# Altium PCB ISL62368v1.PcbDoc
Units mm, origin at the board's own origin, x right, y up, seen from the top; angles counter-clockwise.
Board outline 50 x 50 mm, 6 copper layers (L1, L2, L3, L4, L5, L6), stack 0.816 mm thick; 41 components, 27 nets, 119 pads, 43 vias.
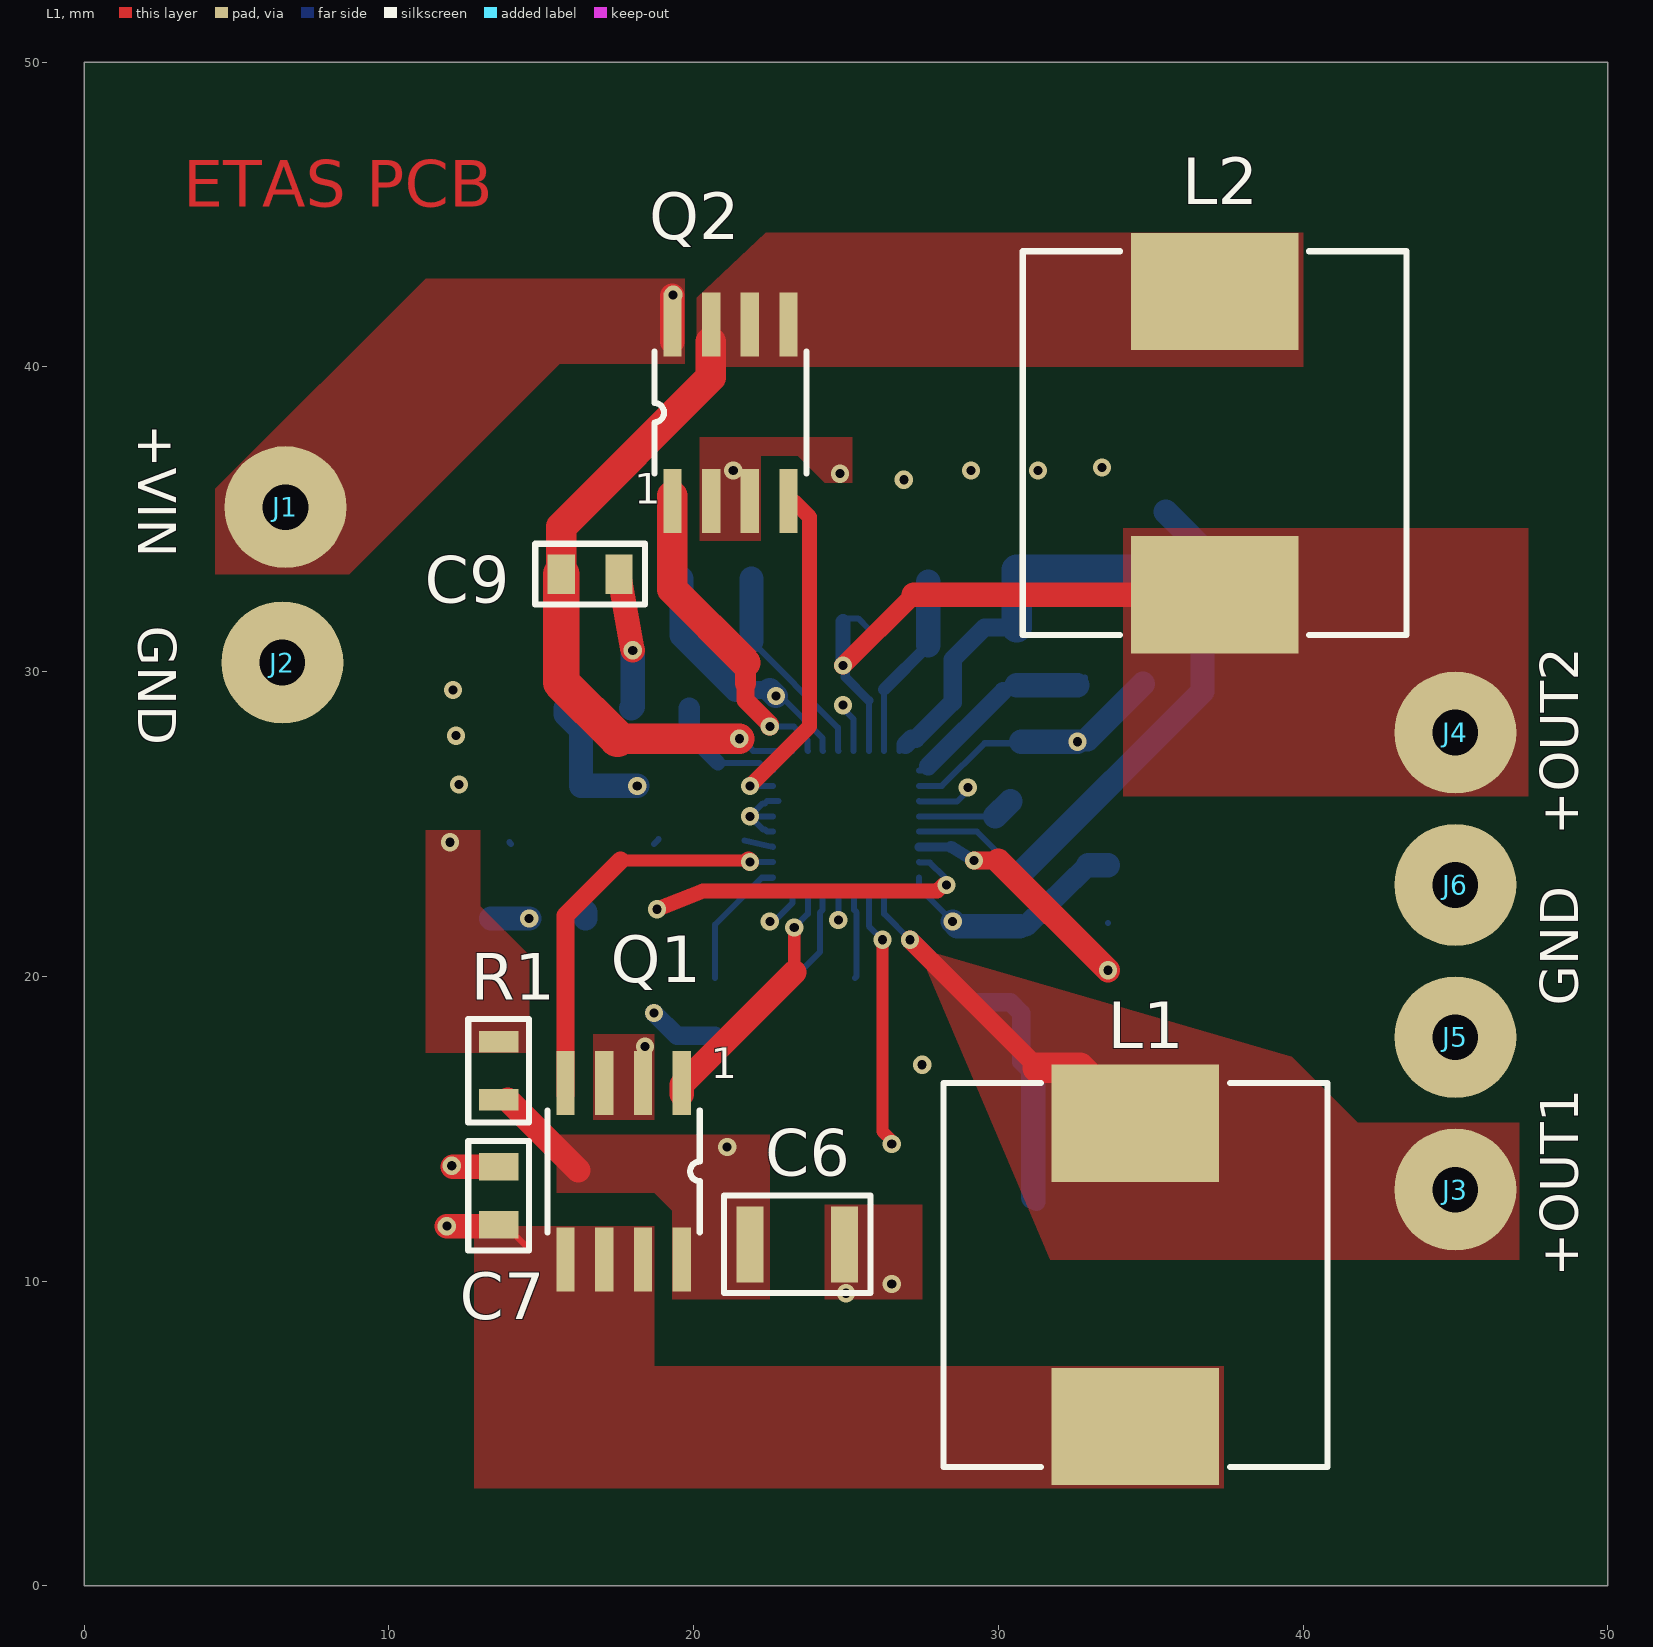
[diagram p0: L1 view]
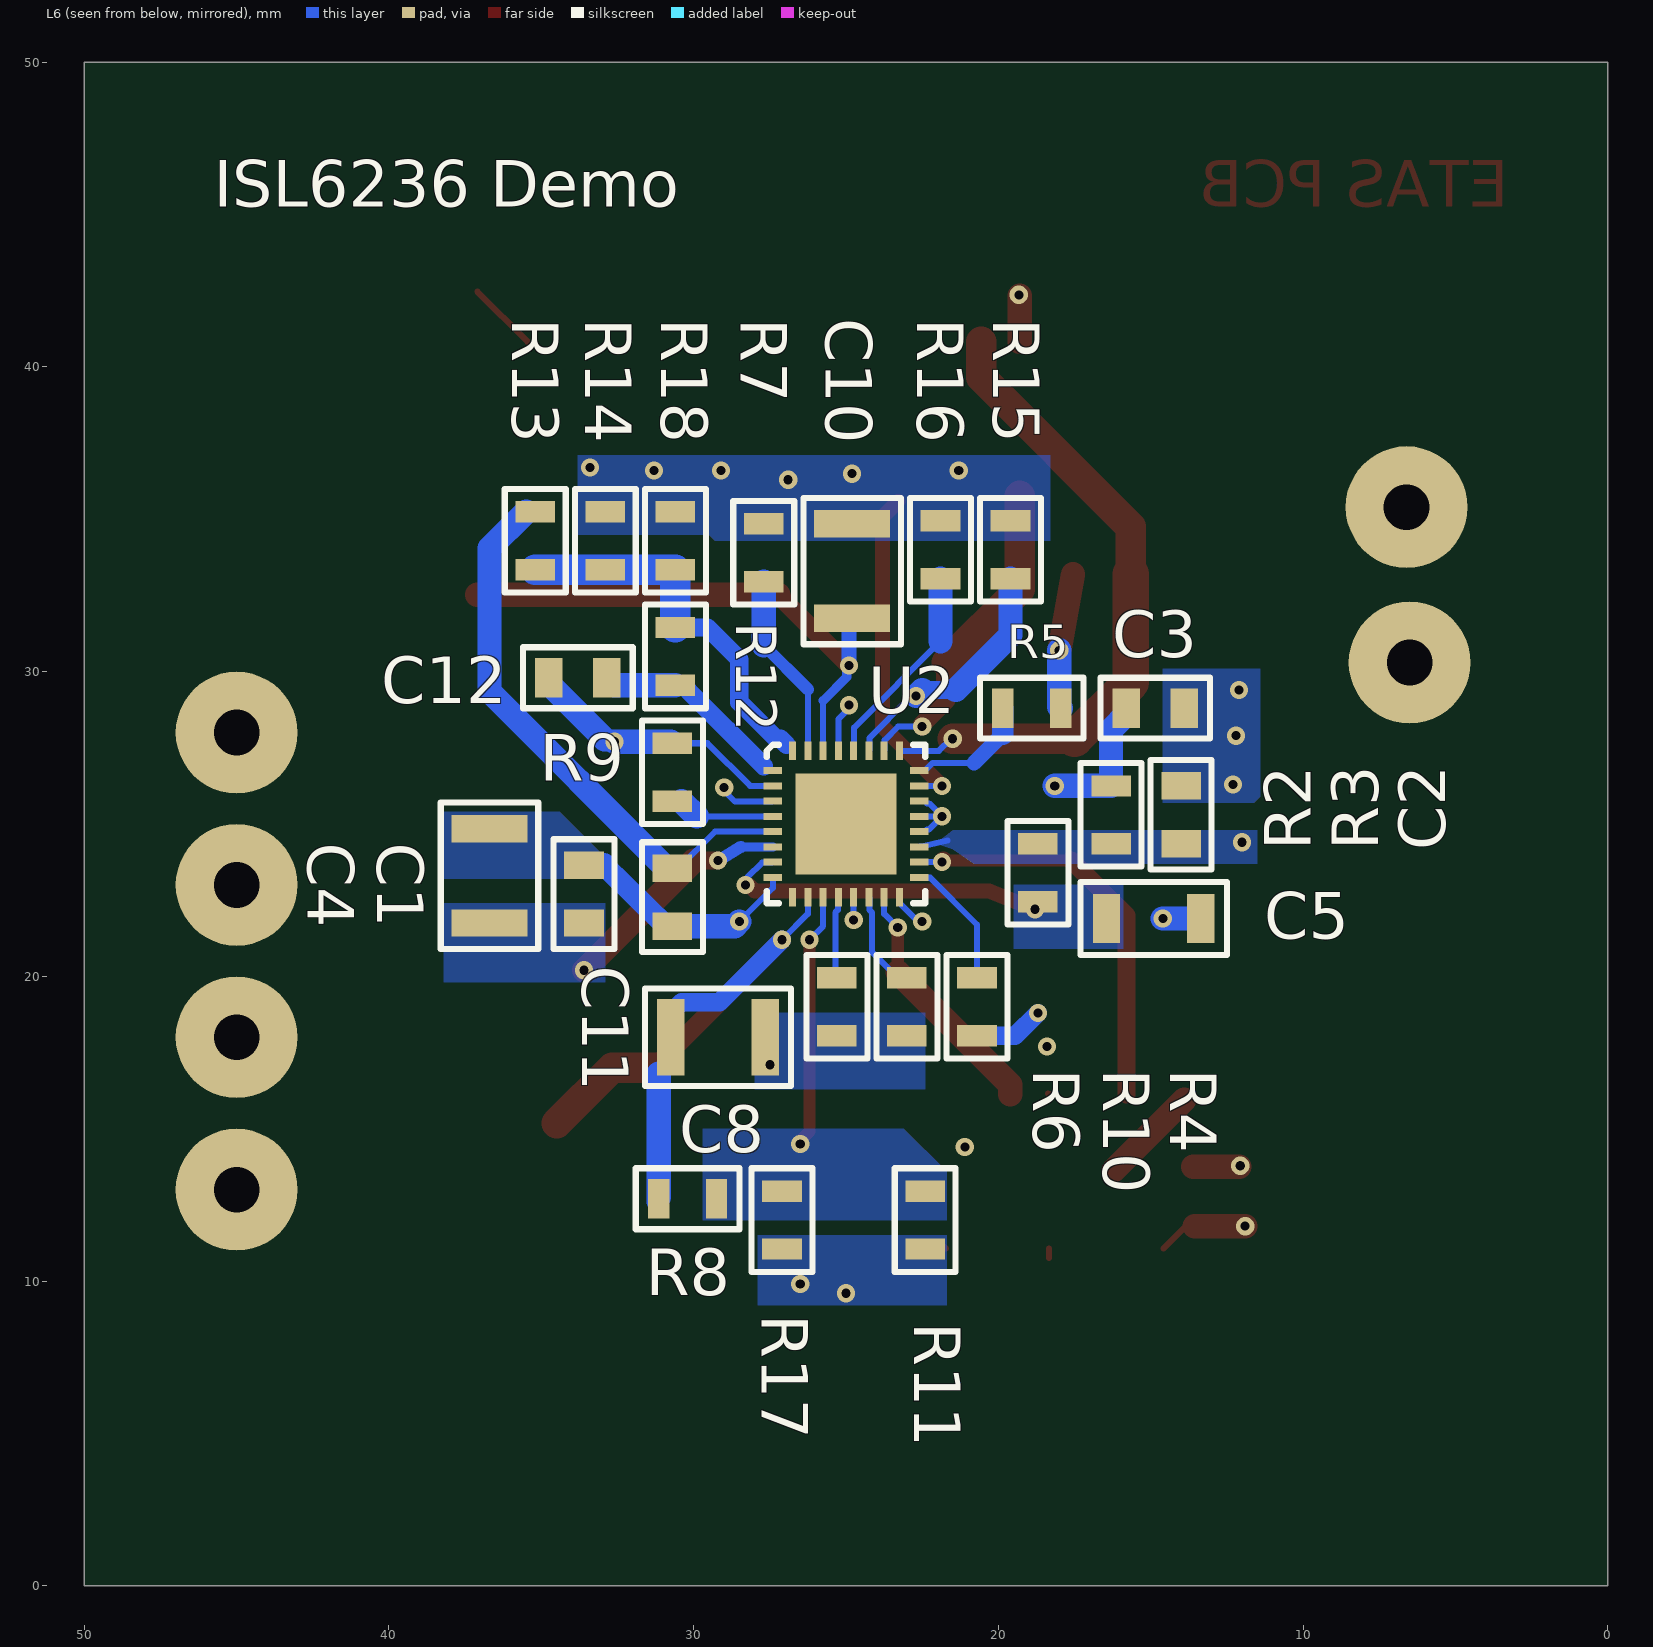
[diagram p1: L6 view, seen from below]
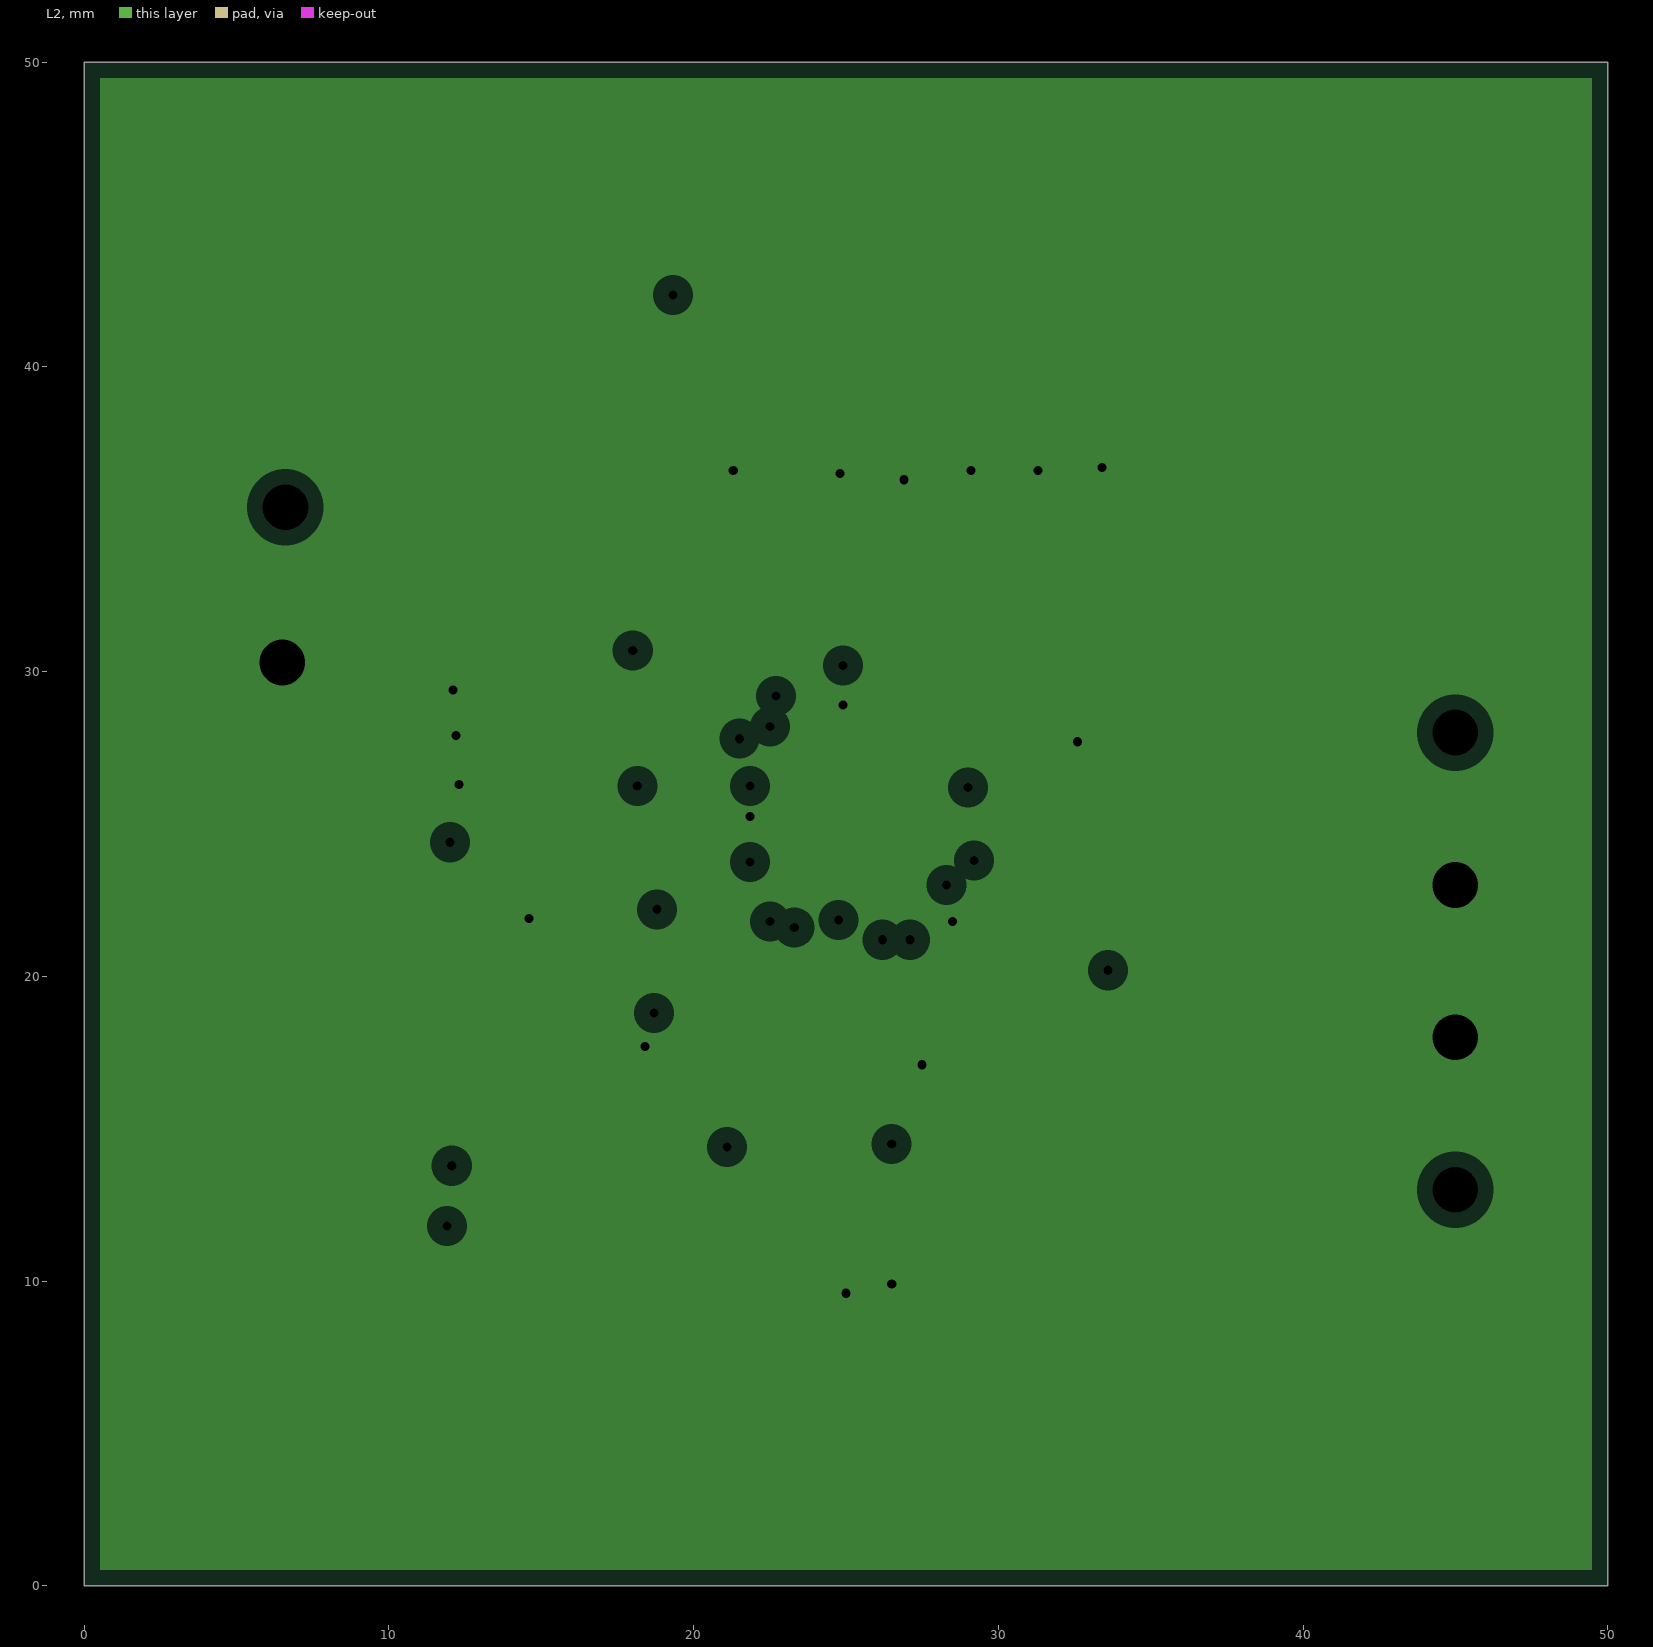
[diagram p2: L2, clearances drawn from the general rule]
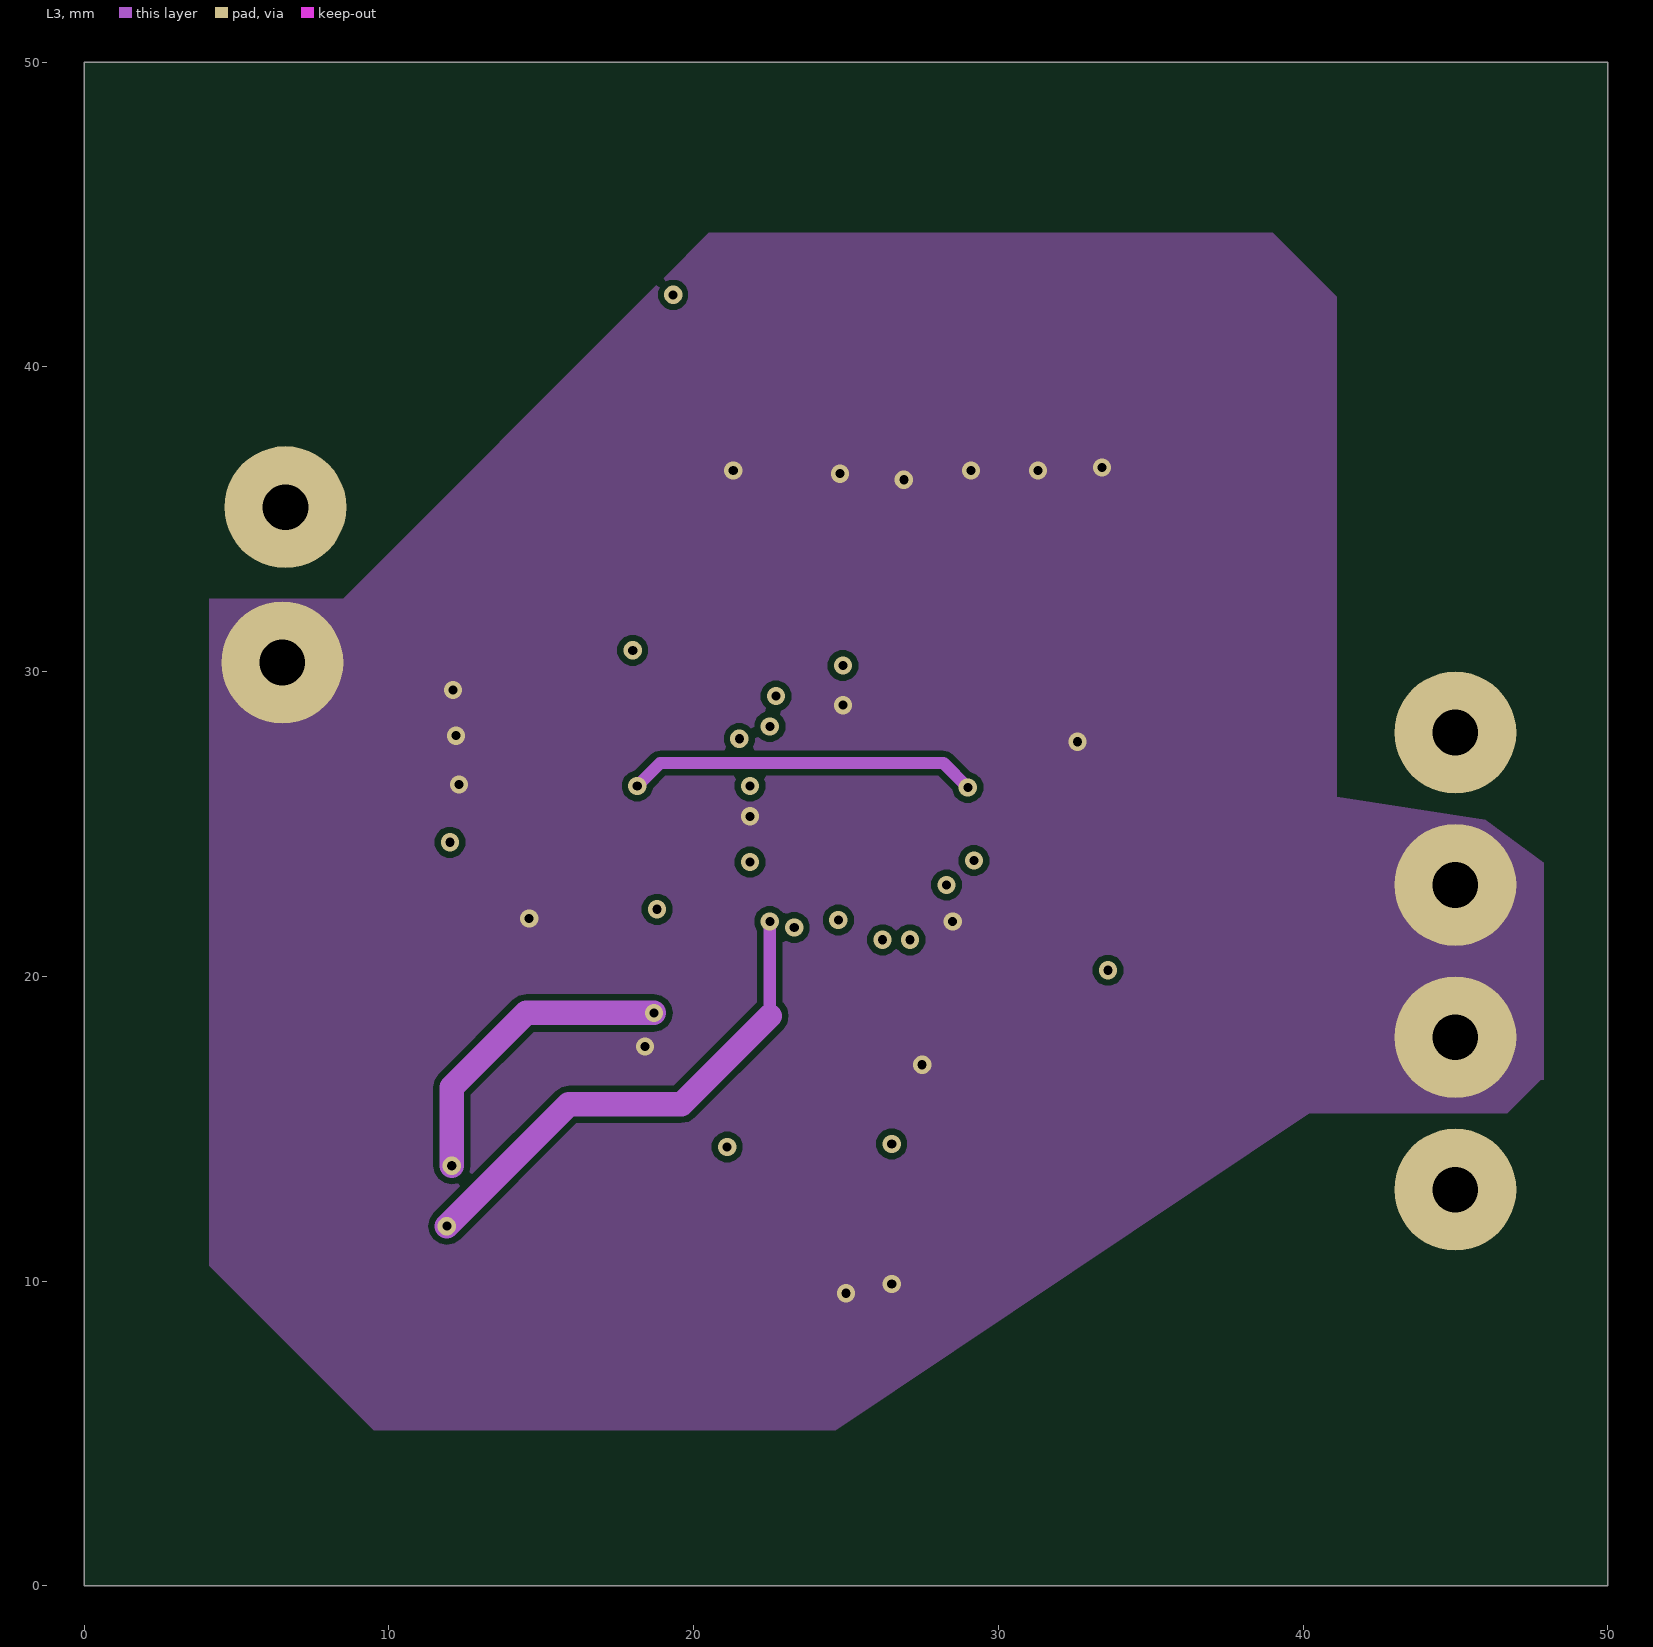
[diagram p3: L3]
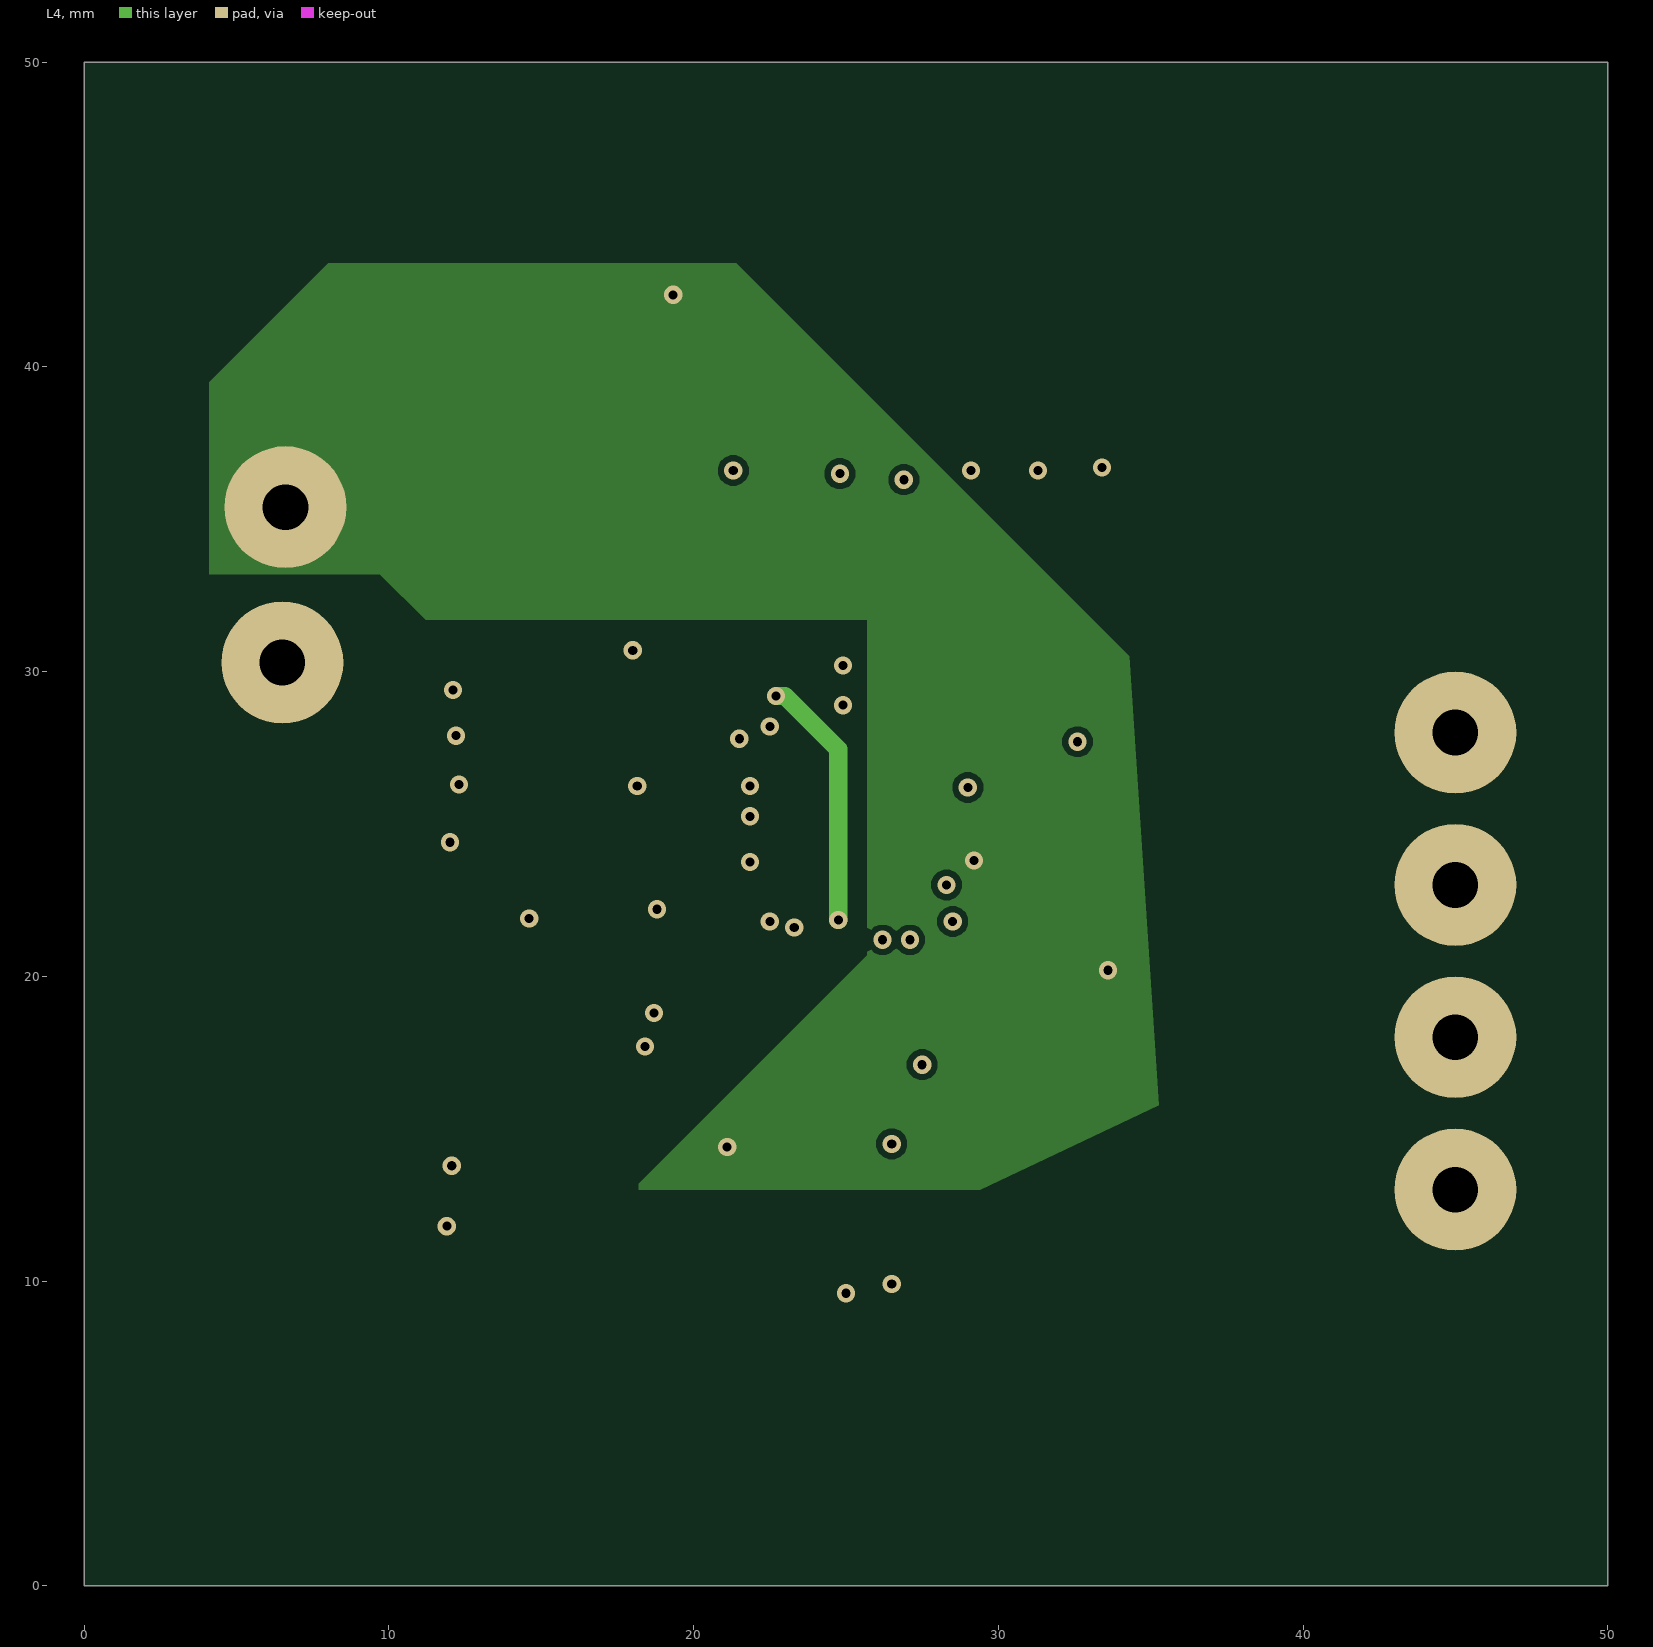
[diagram p4: L4]
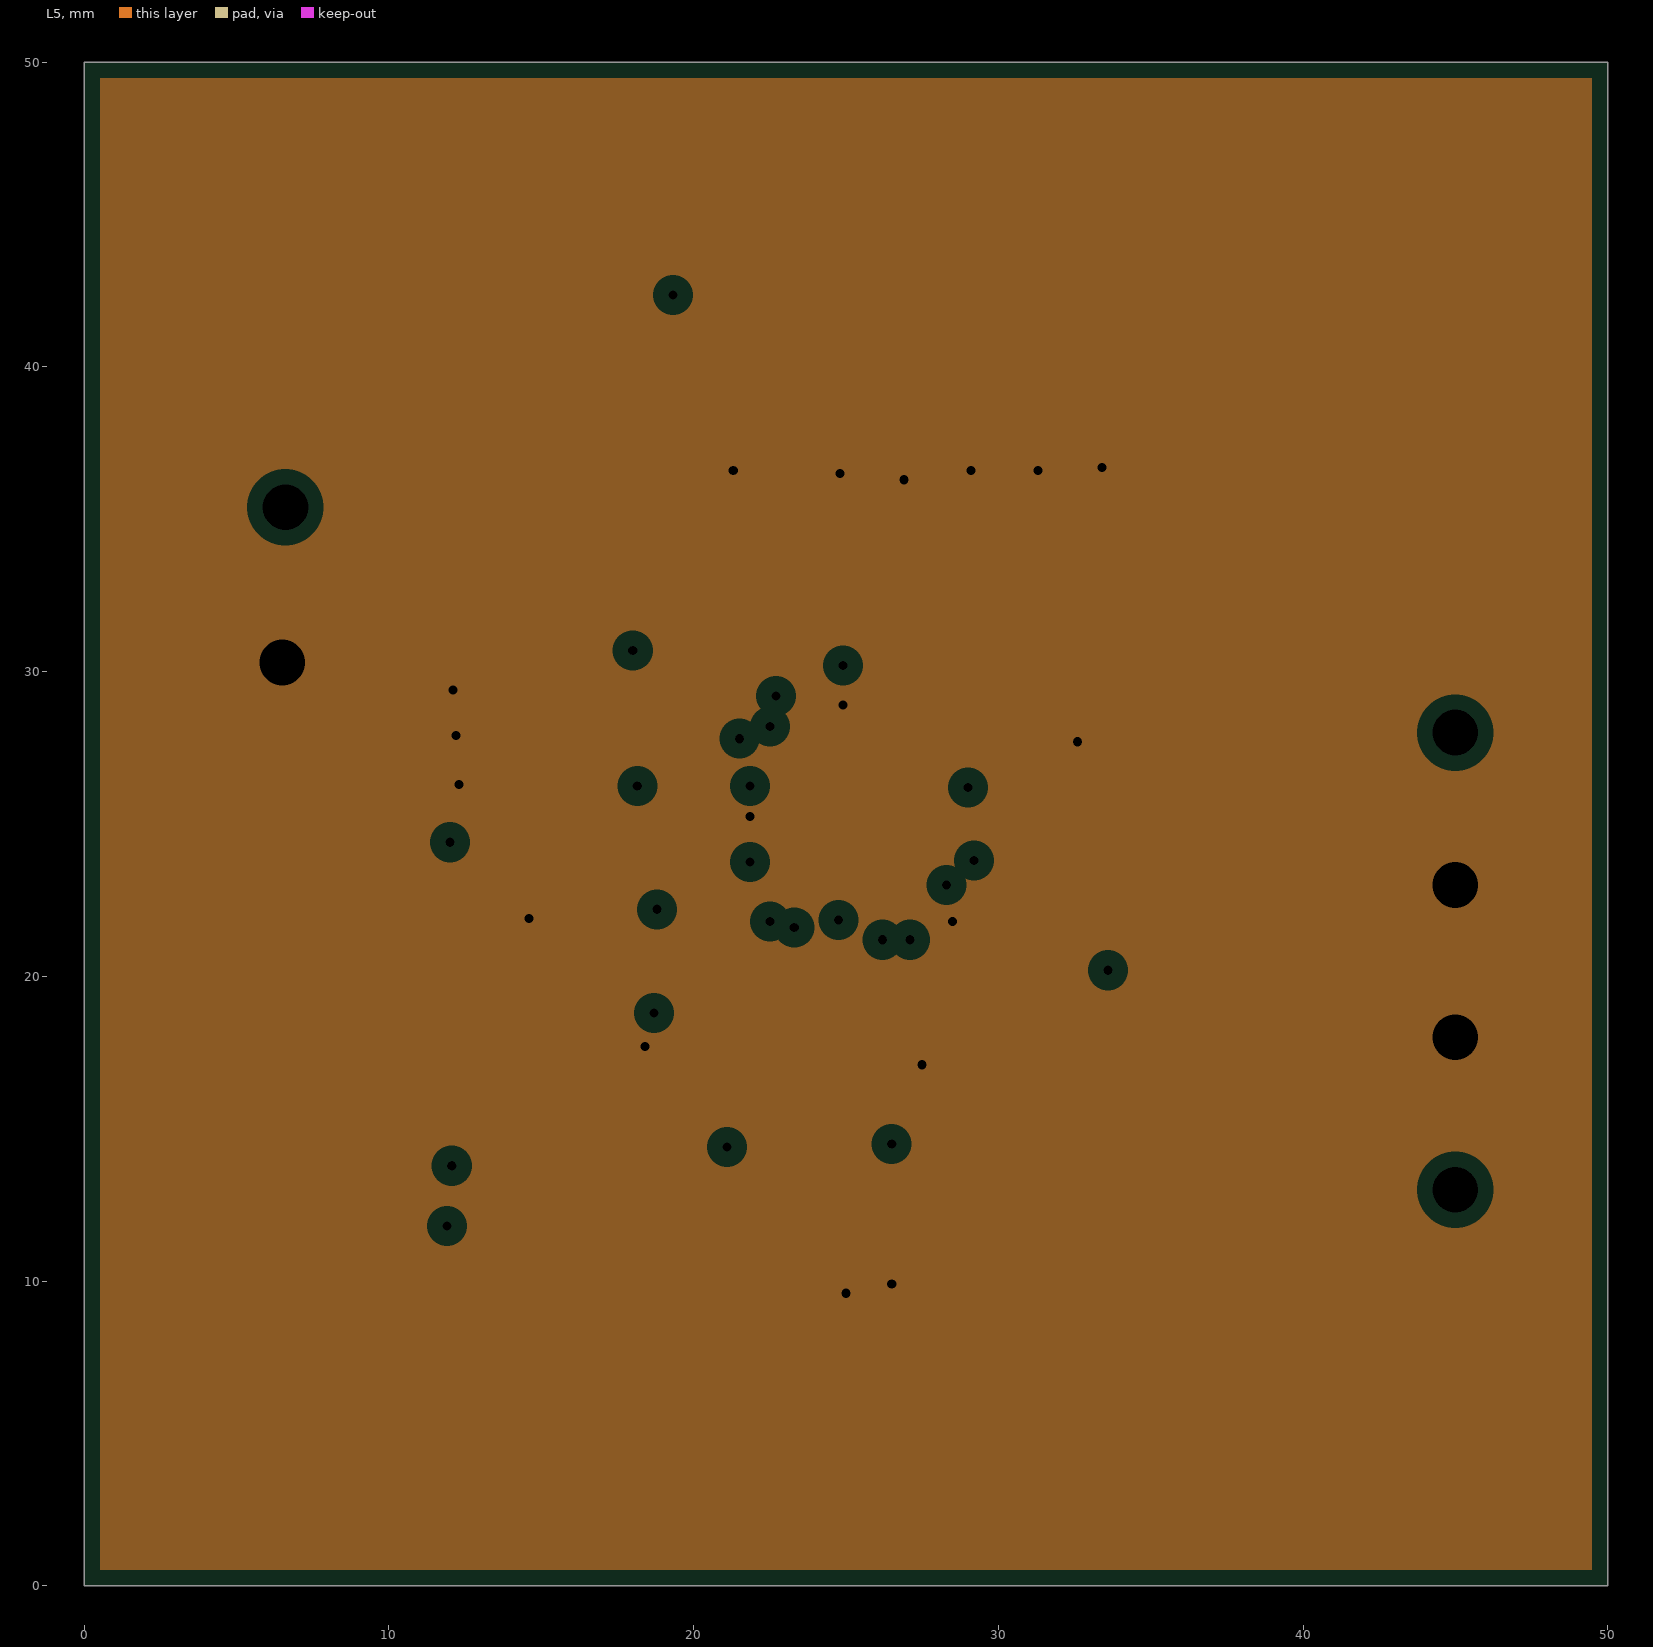
[diagram p5: L5, clearances drawn from the general rule]

## Layer stack, top to bottom
Top Solder: solder mask 0.0102, Solder Resist, Dk 3.5
L1: signal copper 0.0356
Dielectric 2: prepreg 0.0711, PP-006, Dk 4.1
L2: plane copper 0.035, net GND
Dielectric 3: prepreg 0.0711, PP-006, Dk 4.1
L3: signal copper 0.035
Dielectric 4: prepreg 0.0711, PP-006, Dk 4.1
L4: signal copper 0.035
Dielectric 5: prepreg 0.0711, PP-006, Dk 4.1
L5: plane copper 0.035, net GND
Dielectric 1: dielectric 0.32, FR-4, Dk 4.8
L6: signal copper 0.0356
Bottom Solder: solder mask 0.0102, Solder Resist, Dk 3.5

## Board outline
0,0 50,0 50,50 0,50

## Design rules (kind name [scope] priority, off if disabled: settings)
Clearance [All] p1: gap=0.2 ignorepadtopadclearanceinfootprint=FALSE
ComponentClearance [All] p1: gap=0.099 collisioncheckmode=3 verticalgap=0.099 showdistances=FALSE
MinimumSolderMaskSliver [All] p1: minsoldermaskwidth=0.1
PlaneClearance [All] p1: clearance=0.508
PlaneConnect [All] p1: planeconnectstyle=Relief reliefexpansion=0.508 reliefentries=4 reliefconductorwidth=0.254 reliefairgap=0.254
PolygonConnect [All] p1: connectstyle=Direct reliefconductorwidth=0.254 reliefentries=4 polygonreliefangle="90 Angle" airgapwidth=0.254
RoutingVias [All] p1: holewidth=0.3 width=0.6 viastyle="Through Hole" minholewidth=0.3 minwidth=0.6 maxholewidth=0.3 maxwidth=0.6
SilkToSolderMaskClearance [IsPad] p1: minsilkscreentomaskgap=0.1 clearancetoexposedcopper=TRUE
SolderMaskExpansion [All] p1: expansion=0.102 istentingtop=FALSE
Width [All] p1: maxlimit=10 minlimit=0.2 preferedwidth=0.2
25 further rules are at their usual default settings.

## Components (designator, comment, footprint, x,y, rotation, side; value= is the part's Value field where it differs from the comment)
C1 "1 µF, 50 V" C0805 33.6,22.7 r270 bottom value=1uF
C2 "1 µF, 50 V" C0805 14,25.3 r270 bottom value=1uF
C3 "1 µF, 50 V" C0805 14.85,28.8 r180 bottom value=1uF
C4 "10 µF" C1210 36.7,23.3 r270 bottom value=10uF
C5 "4.7 µF" C1206 14.9,21.9 r0 bottom
C6 "10 µF" C1210 23.4,11.2 r180 top value=10uF
C7 "100 nF" C0805 13.6,12.8 r90 top value=100nF
C8 "330 µF" C1210 29.2,18 r180 bottom
C9 "220 nF" C0805 16.6,33.2 r0 top value=220nF
C10 "330 µF" C1210 24.8,33.3 r90 bottom
C11 "10 nF" C0805 30.7,22.6 r270 bottom value=10nF
C12 "100 nF" C0805 33.8,29.8 r0 bottom value=100nF
J1 "4MMx1.5MM" PAD_HOLE_4MMx1MM5#1 6.6,35.4 r0 top
J2 "4MMx1.5MM" PAD_HOLE_4MMx1MM5#1 6.5,30.3 r0 top
J3 "4MMx1.5MM" PAD_HOLE_4MMx1MM5#2 45,13.3 r0 top
J4 "4MMx1.5MM" PAD_HOLE_4MMx1MM5#3 45.2,27.5 r0 top
J5 "4MMx1.5MM" PAD_HOLE_4MMx1MM5#4 45.1,17.602 r0 top
J6 "4MMx1.5MM" PAD_HOLE_4MMx1MM5#5 44.9,22.9 r0 top
L1 "3.3 µH DR125-3R3-R" DR125 34.5,10.2 r270 top
L2 "2.2 µH DR125-2R2-R" DR125 37.1,37.5 r270 top
Q1 "SI4816BDY-T1-E3" SO-8 17.7,13.6 r270 top
Q2 "SI4816BDY-T1-E3" SO-8 21.209,38.502 r90 top
R1 "0R" R0805 13.6,16.9 r90 top
R2 "0R" R0805 18.7,23.4 r270 bottom
R3 "10R" R0805 16.3,25.3 r90 bottom
R4 "1R" R0805 20.7,19 r90 bottom
R5 "1R" R0805 18.9,28.8 r180 bottom
R6 "200 K" R0805 25.3,19 r90 bottom
R7 "200 K" R0805 27.7,33.9 r90 bottom
R8 "DNF" R0805 30.2,12.7 r0 bottom
R9 "10K" R0805 30.7,26.7 r90 bottom
R10 "10K" R0805 23,19 r270 bottom
R11 "0R" R0805 22.4,12 r270 bottom
R12 "DNF" R0805 30.6,30.5 r270 bottom
R13 "0R" R0805 35.2,34.3 r90 bottom
R14 "DNF" R0805 32.9,34.3 r90 bottom
R15 "200 K" R0805 19.6,34 r90 bottom
R16 "200 K" R0805 21.9,34 r90 bottom
R17 "DNF" R0805 27.1,12 r90 bottom
R18 "DNF" R0805 30.6,34.3 r270 bottom
U2 "ISL6236AIRZ" L32.5x5B 25,25 r180 bottom

## Footprints (in the part's own frame and the unit in brackets; to place one, negate y for a bottom-side part, rotate by r counter-clockwise, add the part's x,y. Pads: shape width x height; smd on the part's side, far side on the other; paste and mask are expansions set on the pad)
C0805 [mm]
  rect 0.9x1.3 smd: 1(-0.95,0) 2(0.95,0)
  silkscreen extent -1.8,-1 1.8,1
C1206 [mm]
  rect 0.9x1.6 smd: 1(-1.55,0) 2(1.55,0)
  silkscreen extent -2.4,-1.2 2.4,1.2
C1210 [mm]
  rect 0.9x2.5 smd: 1(-1.55,0) 2(1.55,0)
  silkscreen extent -2.4,-1.6 2.4,1.6
DR125 [mm]
  rect 3.85x5.5 smd: 1(-4.975,0) 2(4.975,0)
  silkscreen extent -6.3,-6.3 6.3,6.3
L32.5x5B [mm]
  rect 0.6x0.23 smd mask+0.051: 1(-2.4,1.75) 2(-2.4,1.25) 3(-2.4,0.75) 4(-2.4,0.25) 5(-2.4,-0.25) 6(-2.4,-0.75) 7(-2.4,-1.25) 8(-2.4,-1.75) 17(2.4,-1.75) 18(2.4,-1.25) 19(2.4,-0.75) 20(2.4,-0.25) 21(2.4,0.25) 22(2.4,0.75) 23(2.4,1.25) 24(2.4,1.75)
  rect 0.23x0.6 smd mask+0.051: 9(-1.75,-2.4) 10(-1.25,-2.4) 11(-0.75,-2.4) 12(-0.25,-2.4) 13(0.25,-2.4) 14(0.75,-2.4) 15(1.25,-2.4) 16(1.75,-2.4) 25(1.75,2.4) 26(1.25,2.4) 27(0.75,2.4) 28(0.25,2.4) 29(-0.25,2.4) 30(-0.75,2.4) 31(-1.25,2.4) 32(-1.75,2.4)
  rect 3.3x3.3 smd mask+0.051: 33(0,0)
  silkscreen extent -2.6,-2.6 2.6,2.6
PAD_HOLE_4MMx1MM5#1 [mm]
  round 4 hole 1.5: 1(0,0)
PAD_HOLE_4MMx1MM5#2 [mm]
  round 4 hole 1.5: 1(0,-0.3)
PAD_HOLE_4MMx1MM5#3 [mm]
  round 4 hole 1.5: 1(-0.2,0.5)
PAD_HOLE_4MMx1MM5#4 [mm]
  round 4 hole 1.5: 1(-0.1,0.398)
PAD_HOLE_4MMx1MM5#5 [mm]
  round 4 hole 1.5: 1(0.1,0.1)
R0805 [mm]
  rect 0.7x1.3 smd: 1(-0.95,0) 2(0.95,0)
  silkscreen extent -1.7,-1 1.7,1
SO-8 [mm]
  rect 2.1x0.6 smd: 1(-2.9,1.905) 2(-2.9,0.635) 3(-2.9,-0.635) 4(-2.9,-1.905) 5(2.9,-1.905) 6(2.9,-0.635) 7(2.9,0.635) 8(2.9,1.905)
  silkscreen extent -2,-2.5 2,2.5

## Part data
C1 C2 C3: library part C0805C105K5RACTU, "Multilayer Ceramic Capacitor, 1 uF, 50 V, ± 10%, X7R, 0805 [2012 Metric]", Case Code (Imperial)=0805, Case Code (Metric)=2012, Dielectric=X7R, Dielectric Material=Ceramic, MANUFACTURER=KEMET, Max Operating Temperature=125°C, Min Operating Temperature=-55°C, Package Quantity=1, Supplier Part Number=399-C0805C105K5RAC7800CT-ND, Tolerance=10%, Voltage=50V, Case/Package=0805, Category="Ceramic Capacitors", ComponentLink1Description=https://datasheet.ciiva.com/7842/1732744-7842192.pdf?src-supplier=Element14, ComponentLink1URL=https://datasheet.ciiva.com/7842/1732744-7842192.pdf?src-supplier=Element14, ComponentLink2Description=https://datasheet.ciiva.com/22700/1851736-22700523.pdf?src-supplier=Element14, ComponentLink2URL=https://datasheet.ciiva.com/22700/1851736-22700523.pdf?src-supplier=Element14, Construction=Flat, Depth=1.25mm, Height=1.25mm, Length=2mm, Manufacturer Part Number=C0805C105K5RACTU, Material=4241ConductorMaterial, Mounting Technology="Surface Mount,PCB", Packaging="Tape and Reel", Pricing="1=0,35, 10=0,231, 50=0,1704, 100=0,1387, 500=0,10954, 1000=0,0925 (USD)", Reach SVHC Compliant=No, RoHS=Yes, RoHS Compliant=Yes, Series=C, Stock=75674, Supplier=Digikey, Termination=SMD/SMT, Thickness=0.055inch, Voltage Rating=50V, Voltage Rating (DC)=50V, Width=0.049inch
C4 C6: library part C1210C106K6PACTU, "Multilayer Ceramic Capacitor, 10 uF, 35 V, ± 10%, X5R, 1210 [3225 Metric]", Case Code (Imperial)=1210, Case Code (Metric)=3225, Dielectric=X5R, Dielectric Material=Ceramic, MANUFACTURER=KEMET, Max Operating Temperature=85°C, Min Operating Temperature=-55°C, Supplier Part Number=399-12070-1-ND, Tolerance=10%, Voltage=35V, Case/Package=1210, Category="Ceramic Capacitors", ComponentLink1Description=http://www.farnell.com/datasheets/2741192.pdf?src-supplier=Farnell, ComponentLink1URL=http://www.farnell.com/datasheets/2741192.pdf?src-supplier=Farnell, ComponentLink2Description=http://www.alliedelec.com/m/d/f3c02ddb98afa3dd1adcb801109671e9.pdf?src-supplier=Allied+Electronics, ComponentLink2URL=http://www.alliedelec.com/m/d/f3c02ddb98afa3dd1adcb801109671e9.pdf?src-supplier=Allied+Electronics, ComponentLink3Description=https://datasheet.octopart.com/C1210C106K6PACTU-KEMET-datasheet-83562113.pdf?src-supplier=Newark, ComponentLink3URL=https://datasheet.octopart.com/C1210C106K6PACTU-KEMET-datasheet-83562113.pdf?src-supplier=Newark, ComponentLink4Description=http://www.farnell.com/datasheets/2741192.pdf?src-supplier=Newark, ComponentLink4URL=http://www.farnell.com/datasheets/2741192.pdf?src-supplier=Newark, ComponentLink5Description=https://datasheet.octopart.com/C1210C106K6PACTU-KEMET-datasheet-86448939.pdf?src-supplier=Farnell, ComponentLink5URL=https://datasheet.octopart.com/C1210C106K6PACTU-KEMET-datasheet-86448939.pdf?src-supplier=Farnell, ComponentLink6Description=https://api.kemet.com/component-edge/download/datasheet/C1210C106K6PAC7800.pdf?src-supplier=Digikey, ComponentLink6URL=https://api.kemet.com/component-edge/download/datasheet/C1210C106K6PAC7800.pdf?src-supplier=Digikey, ComponentLink7Description=http://www.kemet.com/docfinder?Partnumber=C1210C106K6PAC7800&src-supplier=Digikey, ComponentLink7URL=http://www.kemet.com/docfinder?Partnumber=C1210C106K6PAC7800&src-supplier=Digikey, ComponentLink8Description=https://datasheet.octopart.com/C1210C106K6PACTU-KEMET-datasheet-130260269.pdf?src-supplier=TME, ComponentLink8URL=https://datasheet.octopart.com/C1210C106K6PACTU-KEMET-datasheet-130260269.pdf?src-supplier=TME, Depth=2.5mm, Dissipation Factor=2.5%, Height=1.9mm, Lead Free=5697LeadFree, Length=3.2mm, Manufacturer Part Number=C1210C106K6PACTU, Mounting Technology="Surface Mount", Packaging="Cut Tape", Pricing="1=0,72, 10=0,503, 50=0,424, 100=0,3452, 500=0,28766 (USD)", RoHS=Yes, RoHS Compliant=Yes, Series="SMD Comm X5R", Stock=21511, Supplier=Digikey, Termination=Solder, Voltage Rating=35V, Voltage Rating (DC)=35V
C5: library part C3216X5R1H475K160AB, "C Series 1206 4.7 uF 50 V ±10 % Tolerance X5R SMT Multilayer Ceramic Capacitor", MANUFACTURER=TDK, Category="Ceramic Capacitors", ComponentLink1Description=https://datasheet.ciiva.com/24216/c3216x5r1h475k160ab-265269-24216325.pdf?src-supplier=Mouser, ComponentLink1URL=https://datasheet.ciiva.com/24216/c3216x5r1h475k160ab-265269-24216325.pdf?src-supplier=Mouser, ComponentLink2Description=https://datasheet.ciiva.com/6286/tdkmlcccaprange-6286230.pdf?src-supplier=Digikey, ComponentLink2URL=https://datasheet.ciiva.com/6286/tdkmlcccaprange-6286230.pdf?src-supplier=Digikey, ComponentLink3Description=https://datasheet.ciiva.com/6286/tdkmlcccaprange-6286233.pdf?src-supplier=Digikey, ComponentLink3URL=https://datasheet.ciiva.com/6286/tdkmlcccaprange-6286233.pdf?src-supplier=Digikey, ComponentLink4Description=https://datasheet.ciiva.com/6286/tdkmlcccaprange-6286236.pdf?src-supplier=Digikey, ComponentLink4URL=https://datasheet.ciiva.com/6286/tdkmlcccaprange-6286236.pdf?src-supplier=Digikey, Manufacturer Part Number=C3216X5R1H475K160AB, Pricing="487=0,2054, 500=0,1924 (USD)", RoHS=Yes, Stock=714, Supplier="Arrow Electronics", Supplier Part Number=C3216X5R1H475K160AB
C7 C12: library part C0805C104K5RACTU, "Multilayer Ceramic Capacitor, 0.1 uF, 50 V, ± 10%, X7R, 0805 [2012 Metric]", Case Code (Imperial)=0805, Case Code (Metric)=2012, Dielectric=X7R, MANUFACTURER=KEMET, Max Operating Temperature=125°C, Min Operating Temperature=-55°C, Package Quantity=4000, Supplier Part Number=399-C0805C104K5RAC7800CT-ND, Temperature Coefficient=30ppm/°C, Tolerance=10%, Voltage=500V, Voltage Rating=50V, Case/Package=0805, Category="Ceramic Capacitors", ComponentLink1Description=https://datasheet.ciiva.com/32431/slceramic-chip-condensers-e-32431755.pdf?src-supplier=Distrelec, ComponentLink1URL=https://datasheet.ciiva.com/32431/slceramic-chip-condensers-e-32431755.pdf?src-supplier=Distrelec, ComponentLink2Description=https://datasheet.ciiva.com/28682/1851736-28682232.pdf?src-supplier=Element14, ComponentLink2URL=https://datasheet.ciiva.com/28682/1851736-28682232.pdf?src-supplier=Element14, Construction=Flat, Depth=1.25mm, Height=0.9mm, Lead Free=5697LeadFree, Lead Pitch=0.75mm, Length=2mm, Manufacturer Part Number=C0805C104K5RACTU, Material=4241ConductorMaterial, Mounting Technology="Surface Mount,PCB", Packaging="Tape and Reel", Pins=2, Pricing="1=0,14, 10=0,091, 50=0,0546, 100=0,043, 500=0,03172, 1000=0,02627 (USD)", Radiation Hardening=No, Reach SVHC Compliant=No, RoHS=Yes, RoHS Compliant=Yes, Series="SMD Comm X7R", Stock=2819204, Supplier=Digikey, Termination=SMD/SMT, Voltage Rating (DC)=50V, Width=1.2mm
C8 C10: library part T530X337M010AHE004, "Cap Tant Solid 330uF 10V X CASE 20% (7.3 X 4.3 X 4mm) SMD 7343-43 0.004 Ohm 125 C T/R", MANUFACTURER=KEMET, Supplier Part Number=399-10376-1-ND, Category="Tantalum Capacitors", ComponentLink1Description=https://datasheet.ciiva.com/11214/datasheetpn-t530x337m010ahe004-11214039.pdf?src-supplier=Avnet, ComponentLink1URL=https://datasheet.ciiva.com/11214/datasheetpn-t530x337m010ahe004-11214039.pdf?src-supplier=Avnet, Manufacturer Part Number=T530X337M010AHE004, Pricing="1=7,14, 10=6,191, 50=5,5562, 100=4,8259 (USD)", RoHS=No, Stock=915, Supplier=Digikey
C9: library part C0805C224K5RACTU, "Multilayer Ceramic Capacitor, 0.22 uF, 50 V, ± 10%, X7R, 0805 [2012 Metric]", Case Code (Imperial)=0805, Case Code (Metric)=2012, Dielectric=X7R, Dielectric Material=Ceramic, MANUFACTURER=KEMET, Max Operating Temperature=125°C, Min Operating Temperature=-55°C, Package Quantity=4000, Supplier Part Number=399-C0805C224K5RACTUCT-ND, Temperature Coefficient=30ppm/°C, Tolerance=10%, Voltage=50V, Case/Package=0805, Category="Ceramic Capacitors", ComponentLink1Description=https://datasheet.ciiva.com/7842/kem-c1002-x7r-smd-7842582.pdf?src-supplier=Element14, ComponentLink1URL=https://datasheet.ciiva.com/7842/kem-c1002-x7r-smd-7842582.pdf?src-supplier=Element14, ComponentLink2Description=https://datasheet.ciiva.com/28682/1851736-28682316.pdf?src-supplier=Element14, ComponentLink2URL=https://datasheet.ciiva.com/28682/1851736-28682316.pdf?src-supplier=Element14, ComponentLink3Description=https://datasheet.ciiva.com/14589/70095383-14589519.pdf?src-supplier=Allied+Electronics, ComponentLink3URL=https://datasheet.ciiva.com/14589/70095383-14589519.pdf?src-supplier=Allied+Electronics, ComponentLink4Description=https://datasheet.ciiva.com/14603/70095383-14603247.pdf?src-supplier=Allied+Electronics, ComponentLink4URL=https://datasheet.ciiva.com/14603/70095383-14603247.pdf?src-supplier=Allied+Electronics, Construction=Flat, Depth=1.25mm, Dissipation Factor=2.5%, Height=1.1mm, Lead Free=5697LeadFree, Lead Pitch=0.75mm, Length=2mm, Manufacturer Part Number=C0805C224K5RACTU, Material=4241ConductorMaterial, Mounting Technology="Surface Mount,PCB", Packaging="Tape and Reel", Pricing="1=0,16, 10=0,106, 50=0,063, 100=0,0496, 500=0,03666, 1000=0,03035 (USD)", Radiation Hardening=No, Reach SVHC Compliant=No, RoHS=Yes, RoHS Compliant=Yes, Series="SMD Comm X7R", Stock=489532, Supplier=Digikey, Termination=SMD/SMT, Voltage Rating=50V, Voltage Rating (DC)=50V, Width=1.2mm
C11: library part C0805F103K5RACTU, "0805 C 10nF Ceramic Multilayer Capacitor; 50 VDC; +125degC; X7R Dielec; +/-10%", Case Code (Imperial)=0805, Case Code (Metric)=2012, Dielectric=X7R, MANUFACTURER=KEMET, Max Operating Temperature=125°C, Min Operating Temperature=-55°C, Package Quantity=1, Supplier Part Number=399-C0805F103K5RAC7800CT-ND, Tolerance=10%, Voltage Rating=50V, Case/Package=0805, Category="Ceramic Capacitors", ComponentLink1Description=https://datasheet.ciiva.com/7842/48829-7842408.pdf?src-supplier=Element14, ComponentLink1URL=https://datasheet.ciiva.com/7842/48829-7842408.pdf?src-supplier=Element14, ComponentLink2Description=https://datasheet.ciiva.com/7842/48829-7842407.pdf?src-supplier=Element14, ComponentLink2URL=https://datasheet.ciiva.com/7842/48829-7842407.pdf?src-supplier=Element14, Construction=Flat, Depth=1.25mm, Height=0.9mm, Lead Free=5697LeadFree, Lead Pitch=0.75mm, Length=2mm, Manufacturer Part Number=C0805F103K5RACTU, Mounting Technology="Surface Mount", Packaging="Cut Tape", Pins=2, Pricing="1=0,24, 10=0,158, 50=0,111, 100=0,0897, 500=0,06662, 1000=0,0583 (USD)", Reach SVHC Compliant=No, RoHS=Yes, RoHS Compliant=Yes, Series=FO-CAP, Stock=5487, Supplier=Digikey, Termination=SMD/SMT, Thickness=0.039inch, Voltage Rating (AC)=50V, Voltage Rating (DC)=50V, Width=0.049inch
J1 J2 J3 J4 J5 J6: library part PAD_HOLE_4MMx1MM5, "Pad with hole 4 mm x 1.5 mm"
L1: library part DR125-3R3-R, "Inductor Power Shielded Drum Core 3.3uH 20% 100KHz Ferrite 9.26A 6.3mOhm DCR T/R", MANUFACTURER="Eaton - Electronics Division", Supplier Part Number=513-1529-1-ND, Category=Uncategorized, Manufacturer Part Number=DR125-3R3-R, RoHS=No, Supplier=Digikey
L2: library part DR125-2R2-R, "Ind Power Shielded Wirewound 2.2uH 20% 100KHz Ferrite 10.9A T/R", MANUFACTURER="Eaton Cooper", Supplier Part Number=513-1662-1-ND, Category="Fixed Inductors", ComponentLink1Description=https://datasheet.ciiva.com/14667/0900766b8116a153-14667792.pdf?src-supplier=Rs, ComponentLink1URL=https://datasheet.ciiva.com/14667/0900766b8116a153-14667792.pdf?src-supplier=Rs, ComponentLink2Description=https://datasheet.ciiva.com/26926/getdatasheetpartid-571249-26926912.pdf?src-supplier=Verical, ComponentLink2URL=https://datasheet.ciiva.com/26926/getdatasheetpartid-571249-26926912.pdf?src-supplier=Verical, ComponentLink3Description=https://datasheet.ciiva.com/8004/87246-8004874.pdf?src-supplier=Element14, ComponentLink3URL=https://datasheet.ciiva.com/8004/87246-8004874.pdf?src-supplier=Element14, Lead Free=5697LeadFree, Manufacturer Part Number=DR125-2R2-R, Pricing="1=1,21, 10=1,02, 25=0,9276, 50=0,8718, 100=0,7234, 250=0,6678 (USD)", RoHS=Yes, Stock=2128, Supplier=Digikey
Q1 Q2: "Transistor MOSFET Array Dual N-CH 30V 5.8A/8.2A 8-Pin SOIC T/R", MANUFACTURER="Vishay Siliconix", Supplier Part Number=SI4816BDY-T1-E3CT-ND, Category=MOSFETs, ComponentLink1Description=https://datasheet.ciiva.com/15137/getdatasheetpartid-99188-15137841.pdf?src-supplier=Verical, ComponentLink1URL=https://datasheet.ciiva.com/15137/getdatasheetpartid-99188-15137841.pdf?src-supplier=Verical, ComponentLink2Description=https://datasheet.ciiva.com/928/si4816bd-928458.pdf?src-supplier=Digikey, ComponentLink2URL=https://datasheet.ciiva.com/928/si4816bd-928458.pdf?src-supplier=Digikey, ComponentLink3Description=https://datasheet.ciiva.com/928/si4816bd-928459.pdf?src-supplier=Digikey, ComponentLink3URL=https://datasheet.ciiva.com/928/si4816bd-928459.pdf?src-supplier=Digikey, ComponentLink4Description=https://datasheet.ciiva.com/928/si4816bd-928460.pdf?src-supplier=Digikey, ComponentLink4URL=https://datasheet.ciiva.com/928/si4816bd-928460.pdf?src-supplier=Digikey, ComponentLink5Description=https://datasheet.ciiva.com/11161/si4816bd-11161496.pdf?src-supplier=Avnet, ComponentLink5URL=https://datasheet.ciiva.com/11161/si4816bd-11161496.pdf?src-supplier=Avnet, ComponentLink6Description=https://datasheet.ciiva.com/16486/si4816bd-16486349.pdf?src-supplier=Future+Electronics, ComponentLink6URL=https://datasheet.ciiva.com/16486/si4816bd-16486349.pdf?src-supplier=Future+Electronics, ComponentLink7Description=https://datasheet.ciiva.com/18448/70026226-18448822.pdf?src-supplier=Allied+Electronics, ComponentLink7URL=https://datasheet.ciiva.com/18448/70026226-18448822.pdf?src-supplier=Allied+Electronics, Manufacturer Part Number=SI4816BDY-T1-E3, Pricing="1=1,58, 10=1,311, 100=1,0438, 500=0,88324, 1000=0,74942 (USD)", RoHS=Yes, Stock=4824, Supplier=Digikey
R1 R2 R11 R13: library part AC0805JR-070RL, "Zero Ohm Resistor, 0805 [2012 Metric], Thick Film, 125 mW, 2 A, Surface Mount", Case Code (Imperial)=0805, Case Code (Metric)=2012, MANUFACTURER=Yageo, Max Operating Temperature=155°C, Max Power Dissipation=125mW, Min Operating Temperature=-55°C, Supplier Part Number=YAG3755CT-ND, Temperature Coefficient=200ppm/°C, Tolerance=5%, Voltage Rating=150V, Case/Package=0805, Category="Chip SMD Resistors", ComponentLink1Description=https://datasheet.octopart.com/AC0805JR-070RL-Yageo-datasheet-166720450.pdf?src-supplier=Future+Electronics, ComponentLink1URL=https://datasheet.octopart.com/AC0805JR-070RL-Yageo-datasheet-166720450.pdf?src-supplier=Future+Electronics, ComponentLink2Description=http://www.yageo.com/documents/recent/PYu-AC_51_RoHS_L_2.pdf?src-supplier=Mouser, ComponentLink2URL=http://www.yageo.com/documents/recent/PYu-AC_51_RoHS_L_2.pdf?src-supplier=Mouser, Features="Moisture Resistant,Automotive AEC-Q200", Height=0.024inch, Lead Free=5697LeadFree, Length=0.079inch, Manufacturer Part Number=AC0805JR-070RL, Number of Terminations=2, Packaging="Tape and Reel", Power Rating=125mW, Pricing="1=0,1, 10=0,035, 25=0,0272, 50=0,0206, 100=0,0144, 250=0,0116, 500=0,00928, 1000=0,00683 (USD)", RoHS=Yes, RoHS Compliant=Yes, Series=AC, Stock=196918, Supplier=Digikey, Termination=SMD/SMT, Width=1.25mm
R3: library part AC0805FR-0710RL, "SMD Chip Resistor, 10 Ohm, ± 1%, 125 mW, 0805 [2012 Metric], Thick Film, General Purpose", MANUFACTURER=Yageo, Supplier Part Number=YAG3690CT-ND, Category="Chip SMD Resistors", ComponentLink1Description=http://www.mouser.com/ds/2/447/yageodocoutput-1111992.pdf?src-supplier=Mouser, ComponentLink1URL=http://www.mouser.com/ds/2/447/yageodocoutput-1111992.pdf?src-supplier=Mouser, ComponentLink2Description=http://www.yageo.com/NewPortal/yageodocoutput?fileName=/pdf/R-Chip/PYu-AC_51_RoHS_L_6.pdf&src-supplier=Digikey, ComponentLink2URL=http://www.yageo.com/NewPortal/yageodocoutput?fileName=/pdf/R-Chip/PYu-AC_51_RoHS_L_6.pdf&src-supplier=Digikey, ComponentLink3Description=https://www.yageo.com/upload/media/product/productsearch/datasheet/rchip/PYu-AC_51_RoHS_L_7.pdf?src-supplier=Digikey, ComponentLink3URL=https://www.yageo.com/upload/media/product/productsearch/datasheet/rchip/PYu-AC_51_RoHS_L_7.pdf?src-supplier=Digikey, ComponentLink4Description=http://www.yageo.com/documents/recent/PYu-AC_51_RoHS_L_2_revised.pdf?src-supplier=Future+Electronics, ComponentLink4URL=http://www.yageo.com/documents/recent/PYu-AC_51_RoHS_L_2_revised.pdf?src-supplier=Future+Electronics, Manufacturer Part Number=AC0805FR-0710RL, Pricing="1=0,11, 10=0,052, 50=0,0338, 100=0,0286, 500=0,02014, 1000=0,01754 (USD)", RoHS=Yes, Stock=169137, Supplier=Digikey
R4 R5: library part AC0805FR-071RL, "SMD Chip Resistor, 1 Ohm, ± 1%, 125 mW, 0805 [2012 Metric], Thick Film, General Purpose", MANUFACTURER=Yageo, Supplier Part Number=YAG3705CT-ND, Category="Chip SMD Resistors", ComponentLink1Description=https://datasheet.ciiva.com/12576/pyu-ac-51-rohs-l-2-12576553.pdf?src-supplier=Mouser, ComponentLink1URL=https://datasheet.ciiva.com/12576/pyu-ac-51-rohs-l-2-12576553.pdf?src-supplier=Mouser, Lead Free=5697LeadFree, Manufacturer Part Number=AC0805FR-071RL, Pricing="1=0,1, 10=0,036, 50=0,0238, 100=0,0201, 500=0,01416, 1000=0,01233 (USD)", RoHS=Yes, Stock=71458, Supplier=Digikey
R6 R7 R15 R16: library part AC0805FR-07200KL, "SMD Chip Resistor, 200 kOhm, ± 1%, 125 mW, 0805 [2012 Metric], Thick Film, General Purpose", MANUFACTURER=Yageo, Supplier Part Number=YAG3706CT-ND, Category="Chip SMD Resistors", ComponentLink1Description=http://www.mouser.com/ds/2/447/yageodocoutput-1111992.pdf?src-supplier=Mouser, ComponentLink1URL=http://www.mouser.com/ds/2/447/yageodocoutput-1111992.pdf?src-supplier=Mouser, ComponentLink2Description=https://datasheet.octopart.com/AC0805FR-07200KL-Yageo-datasheet-151884373.pdf?src-supplier=Future+Electronics, ComponentLink2URL=https://datasheet.octopart.com/AC0805FR-07200KL-Yageo-datasheet-151884373.pdf?src-supplier=Future+Electronics, ComponentLink3Description=http://www.yageo.com/NewPortal/yageodocoutput?fileName=/pdf/R-Chip/PYu-AC_51_RoHS_L_6.pdf&src-supplier=Digikey, ComponentLink3URL=http://www.yageo.com/NewPortal/yageodocoutput?fileName=/pdf/R-Chip/PYu-AC_51_RoHS_L_6.pdf&src-supplier=Digikey, ComponentLink4Description=http://www.yageo.com/documents/recent/PYu-AC_51_RoHS_L_2.pdf?src-supplier=Future+Electronics, ComponentLink4URL=http://www.yageo.com/documents/recent/PYu-AC_51_RoHS_L_2.pdf?src-supplier=Future+Electronics, Lead Free=5697LeadFree, Manufacturer Part Number=AC0805FR-07200KL, Pricing="1=0,1, 10=0,031, 50=0,0198, 100=0,0166, 500=0,01152, 1000=0,00997 (USD)", RoHS=Yes, Stock=25141, Supplier=Digikey
R8 R12 R14 R17 R18: library part RES
R9 R10: library part AC0805FR-0710KL, "SMD Chip Resistor, 10 kOhm, ± 1%, 125 mW, 0805 [2012 Metric], Thick Film, General Purpose", MANUFACTURER=Yageo, Supplier Part Number=311-10KLGCT-ND, Category="Chip SMD Resistors", ComponentLink1Description=https://datasheet.ciiva.com/5558/pyu-ac-51-rohs-l-2-5558347.pdf?src-supplier=Mouser, ComponentLink1URL=https://datasheet.ciiva.com/5558/pyu-ac-51-rohs-l-2-5558347.pdf?src-supplier=Mouser, Manufacturer Part Number=AC0805FR-0710KL, Pricing="1=0,1, 10=0,031, 50=0,0198, 100=0,0166, 500=0,01152, 1000=0,00997 (USD)", RoHS=Yes, Stock=449609, Supplier=Digikey
U2: "ISL6236A Series 25 V Dual Step-Down Switch-Mode Power-Supply Controller - QFN-32", Frequency=500kHz, MANUFACTURER=Renesas, Output Voltage=5.5V, Supplier Part Number=ISL6236AIRZ-ND, ComponentLink1Description=https://datasheet.octopart.com/ISL6236AIRZ-Renesas-datasheet-138160199.pdf?src-supplier=Future+Electronics, ComponentLink1URL=https://datasheet.octopart.com/ISL6236AIRZ-Renesas-datasheet-138160199.pdf?src-supplier=Future+Electronics, ComponentLink2Description=http://www.intersil.com/content/dam/Intersil/documents/isl6/isl6236a.pdf?src-supplier=Digikey, ComponentLink2URL=http://www.intersil.com/content/dam/Intersil/documents/isl6/isl6236a.pdf?src-supplier=Digikey, Manufacturer Part Number=ISL6236AIRZ, Pricing="1=6,37, 10=5,754, 25=5,4868, 80=4,76413, 230=4,55004, 490=4,14857, 980=3,61328, 2450=3,47945 (USD)", RoHS=Yes, Stock=2220, Supplier=Digikey

## Via types
v1: diameter 0.6, hole 0.3, L1 to L6, tented both sides, 43 vias

## Nets (pads, with @x,y where several pads share a name; then routed paths per layer and width w, separated by ;. In a path a pad name is that pad's centre, name@x,y a point inside that pad or via, vN(x,y) a via of type N, cw(c..) or ccw(c..) an arc to the next point about the centre after c; other vN are vias at no path point)
+1V5: C8.1 J3.1 L1.1 R8.2 U2.10 | length 23.1
  L1 w0.6: v1(27.1,21.2) 31.3,17
  L1 w1: 31.3,17 32.675,17 L1.1
  L6 w0.2: U2.10 26.25,22.05 v1(27.1,21.2) ; R8.2 31.15,12.75 R8.2@31.4,13
  L6 w0.6: v1(27.1,21.2) 29.15,19.15 30.4,19.15 30.75,18.8 C8.1 30.75,17.2 C8.1@31.15,16.8 ; R8.2 R8.2@31.25,12.6
  L6 w0.8: R8.2@31.15,12.75 C8.1@31.15,16.8
+1V05: C10.1 J4.1 L2.2 U2.30 | length 19
  L1 w0.6: v1(24.9,30.2) 27.225,32.525
  L1 w0.8: 27.225,32.525 L2.2
  L6 w0.2: v1(24.9,30.2) v1@24.974,30.126 ; C10.1@24.9,31.65 C10.1 25.4,31.75 C10.1@25.75,31.4 ; U2.30 25.75,29.05
  L6 w0.3: v1@24.974,30.126 24.974,29.826 25.75,29.05
  L6 w0.5: v1(24.9,30.2) C10.1@24.9,31.65
+5V_LDO: C5.2 R2.2 U2.7 | length 11.2
  L1 w0.5: v1(18.8,22.2) 20.3,22.8 27.992,22.8 28.192,23 v1(28.3,23)
  L6 w0.2: U2.7 27.415,23.735 27.754,23.735 28.223,23.266 28.223,23.077 v1(28.3,23)
  L6 w0.8: C5.2 C5.2@16.45,22.1
+5V_PVCC: C2.2 R1.2 R2.1 R3.1 U2.19 | length 1.3
  L6 w0.2: C2.2@13.95,24.4 C2.2 ; R2.1 R2.1@18.85,24.5 ; 21.666,24.458 U2.19 U2.19@22.585,24.265
  other v1: 12,24.4
+VIN: C1.2 C4.2 C6.2 J1.1 Q1.8 Q2.8 R1.1 U2.6 | length 13.9
  L1 w0.2: R1.1 R1.1@13.9,15.95 ; C6.2@21.723,11.073 C6.2@21.9,11.25
  L1 w0.6: v1(29.2,23.8) 30,23.8
  L1 w0.8: R1.1@13.9,15.95 16.215,13.635 ; Q2.8@19.295,40.827 Q2.8@19.295,42.335 ; 30,23.8 v1(33.6,20.2)
  L6 w0.2: J1.1@5.847,35.4 J1.1
  L6 w0.3: U2.6 28.45,24.25
  L6 w0.4: 28.45,24.25 v1(29.2,23.8)
  other v1: 21.1,14.4 19.328,42.367
EN1: R10.1 U2.14 | length 3.3
  L6 w0.2: R10.1 23.3,19.95 24.15,20.8 24.15,22.099 24.235,22.184 24.235,22.585 U2.14
EN_LDO: R9.1 U2.4 | length 3.5
  L6 w0.2: U2.4 29.9,25.25 ; R9.1@30.4,25.75 R9.1
  L6 w0.8: 29.9,25.25 R9.1@30.4,25.75
FB1: R8.1 R11.1 R17.2 U2.11 | length 8.4
  L1 w0.2: v1(26.5,14.5) v1@26.5,14.608
  L1 w0.4: v1(26.2,21.2) 26.2,14.908 v1@26.5,14.608
  L6 w0.2: U2.11 25.75,21.65 v1(26.2,21.2)
GND: C1.1 C2.1 C3.2 C4.1 C5.1 C6.1 C8.2 C10.2 C11.2 C12.2 J2.1 J5.1 J6.1 Q1.2 Q1.3 Q2.2 Q2.3 R6.1 R7.2 R9.2 R10.2 R11.2 R14.2 R15.2 R16.2 R17.1 R18.1 U2.2 U2.8 U2.20 U2.21 U2.22 U2.29 | length 23.3
  L1 w0.2: Q1.2@18.335,16.127 Q1.2@18.367,16.16 ; v1@18.367,17.667 v1(18.4,17.7)
  L6 w0.2: U2.20 22.415,24.75 22.339,24.826 22.274,24.826 v1(21.85,25.25) ; U2.21 v1(21.85,25.25) ; U2.22@22.785,25.75 U2.22 22.415,25.75 22.339,25.674 22.274,25.674 v1(21.85,25.25) ; v1(24.9,28.9) 24.9,28.792 25.25,28.442 U2.29 ; U2.8 27.4,22.9 v1(28.5,21.8) ; U2.2 28.15,26.25 29.55,27.65 R9.2 R9.2@30.75,27.7 ; C11.2 30.9,21.65 C11.2@31.25,22 ; v1(32.6,27.7) 32.677,27.777 32.927,27.777 ; C12.2@34.75,29.6 C12.2 C12.2@34.85,29.7
  L6 w0.7: C11.2@30.9,21.65 C1.1@32.95,23.65
  L6 w0.8: C5.1 v1(14.6,21.9) ; v1(28.5,21.8) 28.65,21.65 C11.2 ; R9.2@30.75,27.7 v1(32.6,27.7) ; 32.927,27.777 C12.2@34.75,29.6 ; C1.1@32.95,23.65 C1.1
  other v1: 25,9.6 26.5,9.9 27.5,17.1 12.3,26.3 12.2,27.9 12.1,29.4 26.9,36.3 24.8,36.5 21.3,36.6 29.1,36.6 31.3,36.6 33.4,36.7
LGATE1: Q1.4 U2.18 | length 13.4
  L1 w0.4: 17.6,23.8 v1@21.8,23.8
  L1 w0.6: Q1.4@15.795,16.127 15.795,21.995 17.6,23.8 ; v1@21.8,23.8 v1(21.85,23.75)
  L6 w0.2: v1(21.85,23.75) U2.18
LGATE2: Q2.4 U2.23 | length 11.1
  L1 w0.5: v1(21.85,26.25) 23.8,28.2 23.8,35.078 Q2.4@23.292,35.587
  L6 w0.2: v1(21.85,26.25) U2.23
NetC3_1: C3.1 R3.2 U2.3 | length 18
  L3 w0.4: v1(18.15,26.25) 18.9,27 28.2,27 v1(29,26.2)
  L6 w0.2: U2.3 27.415,25.735 28.643,25.735 29,26.092 v1(29,26.2)
  L6 w0.8: C3.1 15.8,28.6 16.3,28.1 R3.2 v1(18.15,26.25)
NetC7_2: C7.2 R4.1 | length 14
  L1 w0.8: v1@12.092,13.75 C7.2
  L3 w0.8: v1(12.06,13.782) 12.06,16.36 14.5,18.8 v1(18.7,18.8)
  L6 w0.6: v1(18.7,18.8) 19.45,18.05 R4.1
NetC9_2: C9.2 R5.2 | length 5.2
  L1 w0.2: C9.2 C9.2@17.9,32.85 ; v1@17.9,30.908 18,30.808 v1(18,30.7)
  L1 w0.8: C9.2 v1(18,30.7)
  L6 w0.8: R5.2 18,28.85 v1(18,30.7)
NetR4_2: R4.2 U2.17 | length 4.3
  L6 w0.2: R4.2 20.7,21.7 22.235,23.235 22.585,23.235 U2.17
NetR5_1: R5.1 U2.24 | length 4.1
  L6 w0.2: R5.1 R5.1@19.885,28.765 ; 20.8,27 22.165,27 22.4,26.765 22.585,26.765 U2.24
  L6 w0.5: 19.85,27.95 20.8,27
  L6 w0.7: 19.85,27.95 R5.1
NetR6_2: R6.2 U2.12 | length 2.7
  L6 w0.2: U2.12 25.265,22.585 25.265,22.184 25.35,22.099 25.35,20 R6.2
NetR7_1: R7.1 U2.31 | length 6.2
  L6 w0.2: U2.31 26.25,29.417
  L6 w0.4: 26.25,29.417 27.7,30.868
  L6 w0.8: 27.7,30.868 R7.1
PHASE1: C7.1 L1.2 Q1.5 Q1.6 Q1.7 U2.16 | length 21.1
  L1 w0.2: C7.1@13.55,11.8 C7.1 13.8,11.85 14.577,11.073 ; Q1.7@18.335,10.755 Q1.7@18.335,11.073
  L1 w0.8: v1(11.9,11.8) C7.1@13.55,11.8
  L3 w0.4: 22.5,18.7 v1(22.5,21.8)
  L3 w0.8: v1(11.9,11.8) 15.9,15.8 19.6,15.8 22.5,18.7
  L6 w0.2: v1(22.5,21.8) 22.577,21.877 22.712,21.877 23.25,22.415 U2.16
PHASE2: C9.1 L2.1 Q2.5 Q2.6 Q2.7 U2.25 | length 24.1
  L1 w0.2: L2.1@35.452,40.827 L2.1
  L1 w1: C9.1 15.65,34.75 20.565,39.665 Q2.7@20.565,40.827 ; 17.5,27.8 v1(21.5,27.8)
  L1 w1.2: C9.1 15.65,29.65 17.5,27.8
  L6 w0.2: v1(21.5,27.8) 21.549,27.8 21.949,27.4 U2.25
POK1: R15.1 U2.13 U2.27 | length 17.2
  L4 w0.6: v1(22.7,29.2) 23,29.2 24.75,27.45 v1(24.75,21.85)
  L6 w0.2: v1@22.931,29.123 24.235,27.82 24.235,27.415 U2.27 ; v1(24.75,21.85) U2.13
  L6 w0.6: 21.4,29.4 v1@22.5,29.4
  L6 w0.8: R15.1 19.6,31.2 21.4,29.4 ; v1@22.5,29.4 v1(22.7,29.2)
POK2: R16.1 U2.28 | length 6.8
  L6 w0.2: 21.9,31 24.735,28.165 24.735,27.415 U2.28
  L6 w0.8: 21.9,31 R16.1
REF: C12.1 R12.2 U2.1 | length 6.8
  L6 w0.2: U2.1 U2.1@27.585,26.75 ; R12.2@30.05,29.215 30.05,29.3 30.3,29.55 R12.2 ; C12.1@32.6,29.55 C12.1
  L6 w0.6: 27.7,26.9 R12.2@30.165,29.365
  L6 w0.8: R12.2 C12.1@32.6,29.55
REFIN2: R12.1 R13.1 R14.1 R18.2 U2.32 | length 13
  L6 w0.2: U2.32 26.75,27.585 26.765,27.6 26.95,27.6 ; 27.15,27.8 27.3,27.8
  L6 w0.6: 26.95,27.6 27.15,27.8 ; 27.3,27.8 28.5,29 28.5,30.4 29.55,31.45 R12.1
  L6 w1: R12.1 R18.2 R14.1 R13.1
UGATE1: Q1.1 U2.15 | length 8.2
  L1 w0.4: 23.3,20.14 v1(23.3,21.6)
  L1 w0.8: Q1.1@19.605,16.127 19.605,16.445 23.3,20.14
  L6 w0.2: v1(23.3,21.6) 23.75,22.05 U2.15
UGATE2: Q2.1 U2.26 | length 10.7
  L1 w0.6: 21.7,29.614 21.7,29.069 22.5,28.269 v1(22.5,28.2)
  L1 w0.7: 21.7,29.614 21.7,30.3
  L1 w1: Q2.1@19.295,35.773 19.295,32.705 21.7,30.3
  L6 w0.2: v1(22.5,28.2) 23.289,28.2 23.735,27.754 23.735,27.415 U2.26
VREF3: C11.1 R13.2 U2.5 | length 18.9
  L6 w0.2: U2.5 29.3,24.75 30.5,23.55 C11.1@30.9,23.55 ; R13.2 R13.2@35.5,35.25
  L6 w0.8: C11.1@30.9,23.55 36.7,29.35 36.7,34.05 R13.2@35.5,35.25
pads on no net: U2.9 U2.33

## Polygon pours and split planes (outlines as drawn)
+5V_PVCC on L1 "+5V_PVCC_L01_P020" (solid, pour order 20): 14.6,17.5 14.6,20.7 13,22.3 13,24.8 11.2,24.8 11.2,17.5 14.4,17.5
+VIN on L1 "+VIN_L01_P008" (solid, pour order 8): 22.5,14.8 22.5,9.4 19.3,9.4 19.3,12.3 18.7,12.9 15.5,12.9 15.5,14.8
GND on L1 "GND_L01_P011" (solid, pour order 11): 20.2,34.3 20.2,37.7 25.2,37.7 25.2,36.2 24.3,36.2 23.416,37.084 22.2,37.084 22.2,34.3
GND on L1 "GND_L01_P010" (solid, pour order 10): 24.3,12.5 27.5,12.5 27.5,9.4 24.3,9.4
GND on L1 "GND_L01_P009" (solid, pour order 9): 16.7,18.1 18.7,18.1 18.7,15.3 16.7,15.3
+VIN on L1 "+VIN_L01_P006" (solid, pour order 6): 19.7,40.1 19.7,42.9 11.2,42.9 4.3,36 4.3,33.2 8.7,33.2 15.6,40.1
+1V05 on L1 "+1V05_L01_P005" (solid, pour order 5): 47.4,25.908 34.1,25.908 34.1,34.7 47.4,34.7
+1V5 on L1 "+1V5_L01_P004" (solid, pour order 4): 47.1,15.2 47.1,10.7 31.7,10.7 27.342,20.936 39.632,17.368 41.8,15.2
PHASE1 on L1 "PHASE1_L01_P001" (solid, pour order 1): 37.4,3.2 37.4,7.2 18.7,7.2 18.7,11.8 12.8,11.8 12.8,3.2
PHASE2 on L1 "PHASE2_L01_P000" (solid, pour order 0): 22.369,44.4 20.1,42.278 20.1,40 40,40 40,44.4
+5V_PVCC on L6 "+5V_PVCC_L06_P021" (solid, pour order 21): 21.5,24.8 11.5,24.8 11.5,23.7 20.8,23.7 21.499,24.166 22.066,24.357
GND on L6 "GND_L06_P019" (solid, pour order 19): 33.1,24.1 34.4,25.4 38.2,25.4 38.2,23.2 33.1,23.2 33.1,24 33,24.1
GND on L6 "GND_L06_P018" (solid, pour order 18): 21.7,11.5 27.9,11.5 27.9,9.2 21.7,9.2
FB1 on L6 "FB1_L06_P017" (solid, pour order 17): 29.7,12 21.7,12 21.7,13.6 23.1,15 29.7,15
GND on L6 "GND_L06_P015" (solid, pour order 15): 22.4,18.8 28,18.8 28,16.3 22.4,16.3
+5V_LDO on L6 "+5V_LDO_L06_P014" (solid, pour order 14): 15.9,23 19.5,23 19.5,20.9 15.9,20.9
GND on L6 "GND_L06_P013" (solid, pour order 13): 14.6,30.1 14.6,25.7 11.6,25.7 11.4,25.9 11.4,30.1
GND on L6 "GND_L06_P012" (solid, pour order 12): 18.3,34.3 29.3,34.3 29.5,34.5 33.8,34.5 33.8,37.1 18.3,37.1
+VIN on L6 "+VIN_L06_P007" (solid, pour order 7): 32.9,19.8 38.2,19.8 38.2,22.4 32.9,22.4
+VIN on L4 "+VIN_L04_P022" (solid, pour order 22): 4.1,33.2 4.1,39.5 8,43.4 21.4,43.4 34.3,30.5 35.266,15.771 29.409,13 18.2,13 18.2,13.2 25.7,20.7 25.7,31.7 11.2,31.7 9.7,33.2
GND on L3 "GND_L03_P023" (solid, pour order 23): 4.1,32.4 8.5,32.4 20.5,44.4 39,44.4 41.1,42.3 41.1,25.9 45.974,25.146 47.9,23.732 47.9,16.6 47.8,16.6 46.7,15.5 40.2,15.5 24.668,5.1 9.5,5.1 4.1,10.5
GND on L5 (split plane): 49.49,0.51 0.51,0.51 0.51,49.49 49.49,49.49
GND on L2 (split plane): 49.49,0.51 0.51,0.51 0.51,49.49 49.49,49.49

## Other copper
L1:
  text "ETAS PCB" at 3.254,45.254 h1.52

## Silkscreen, mask and mechanical layers (free items; w line width, h text height)
Top Overlay:
  text "+VIN" at 1.764,38.114 h1.24 r270
  text "GND" at 1.764,31.51 h1.24 r270
  text "+OUT2" at 49.036,24.624 h1.24 r90
  text "GND" at 49.036,19.036 h1.24 r90
  text "+OUT1" at 49.036,10.146 h1.24 r90
Bottom Overlay:
  text "ISL6236 Demo" at 45.746,45.254 h1.52
Top Solder:
  text "ETAS PCB" at 3.3,45.3 h1.52

## Text inside footprints (layer, text, board x,y; h text height)
Q1: Top Overlay "1" at 20.554,16.654 h1
Q2: Top Overlay "1" at 18.043,35.508 h1